# Allegro board POWER-PCB_2-2-2_160505.brd
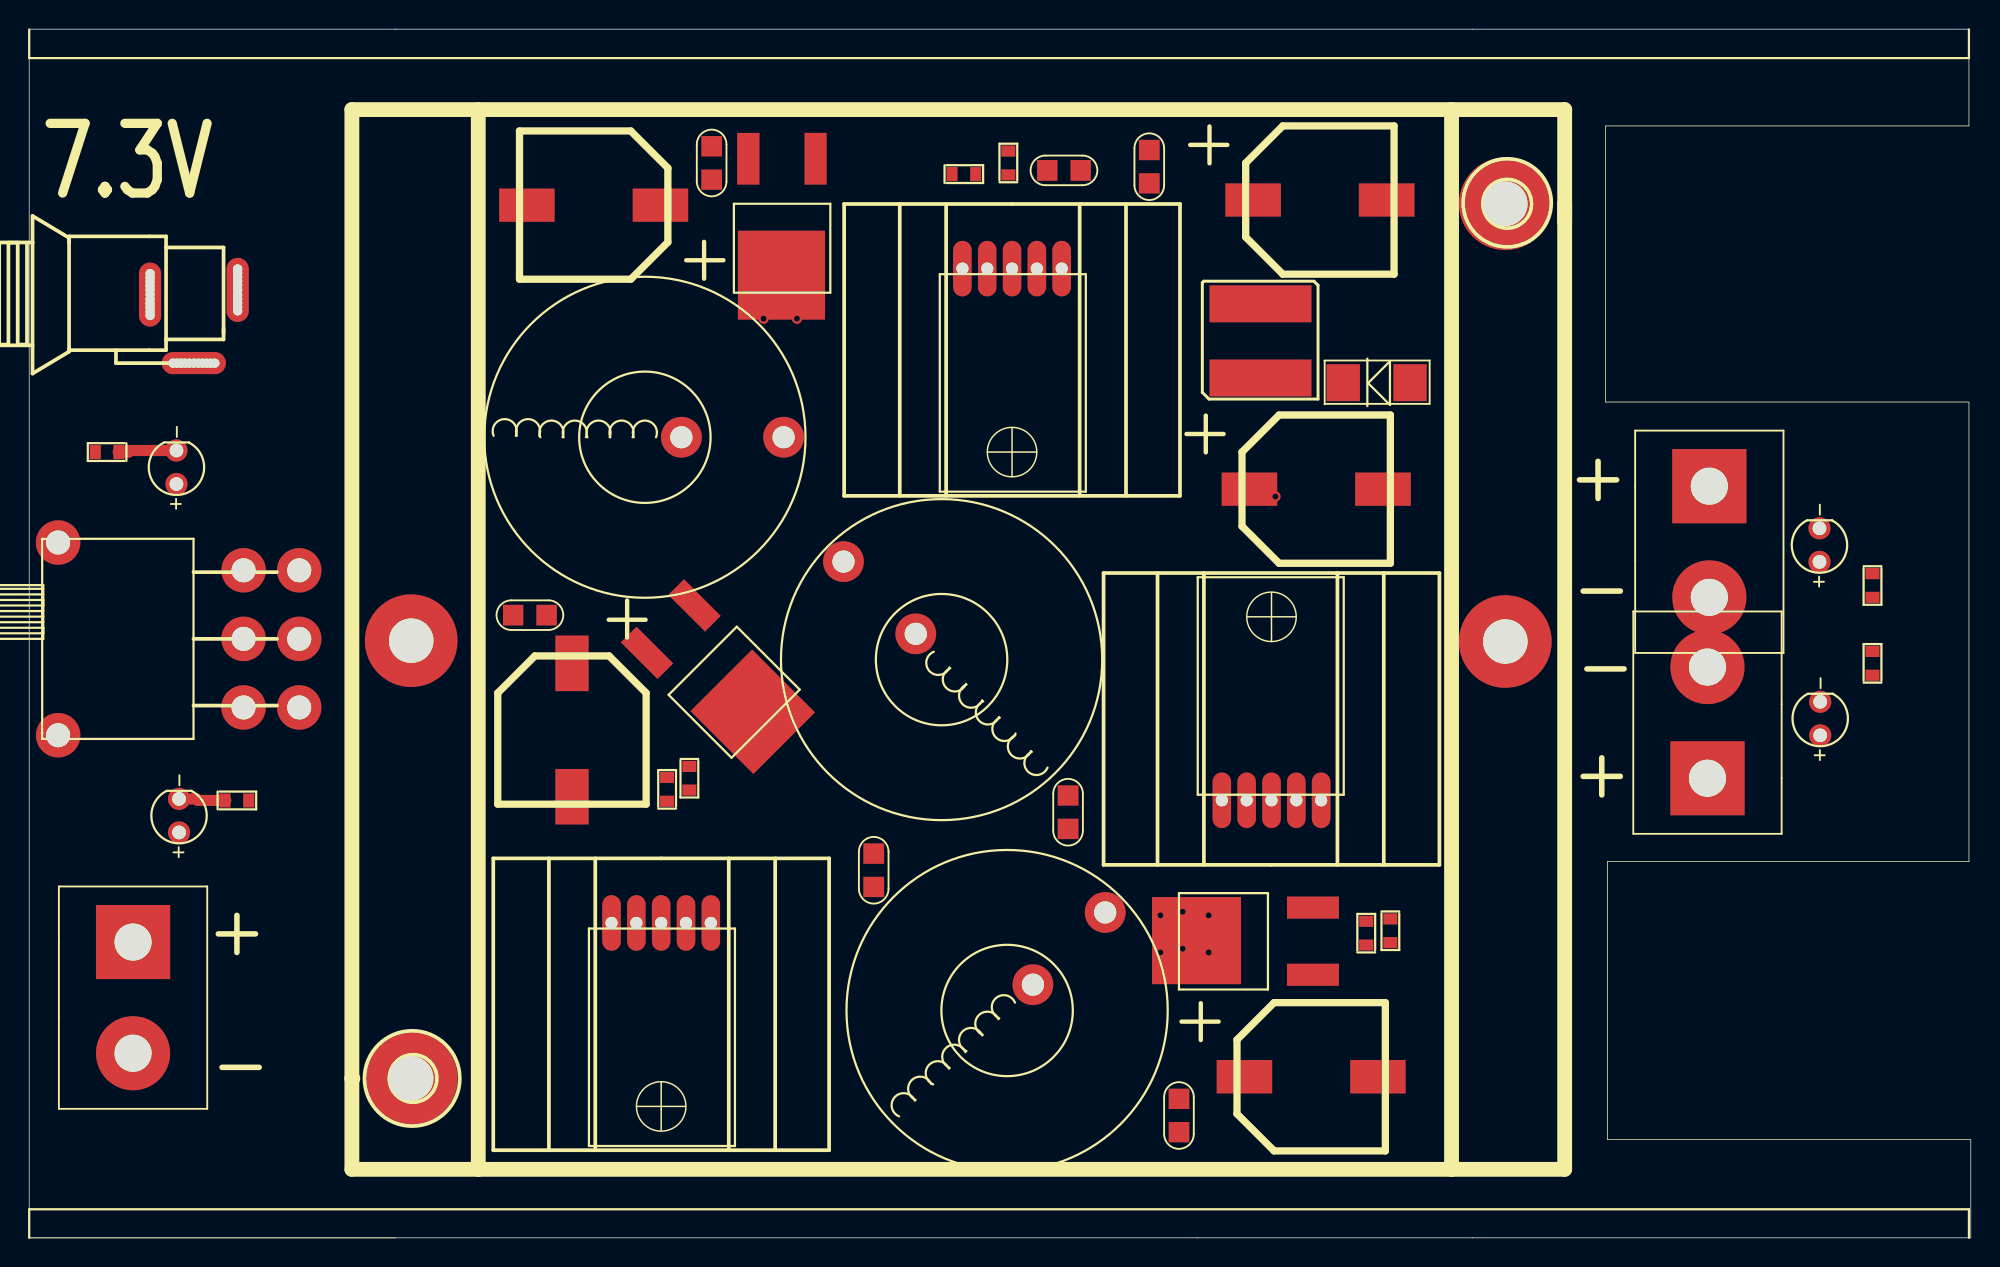
[diagram p0: board, top side]
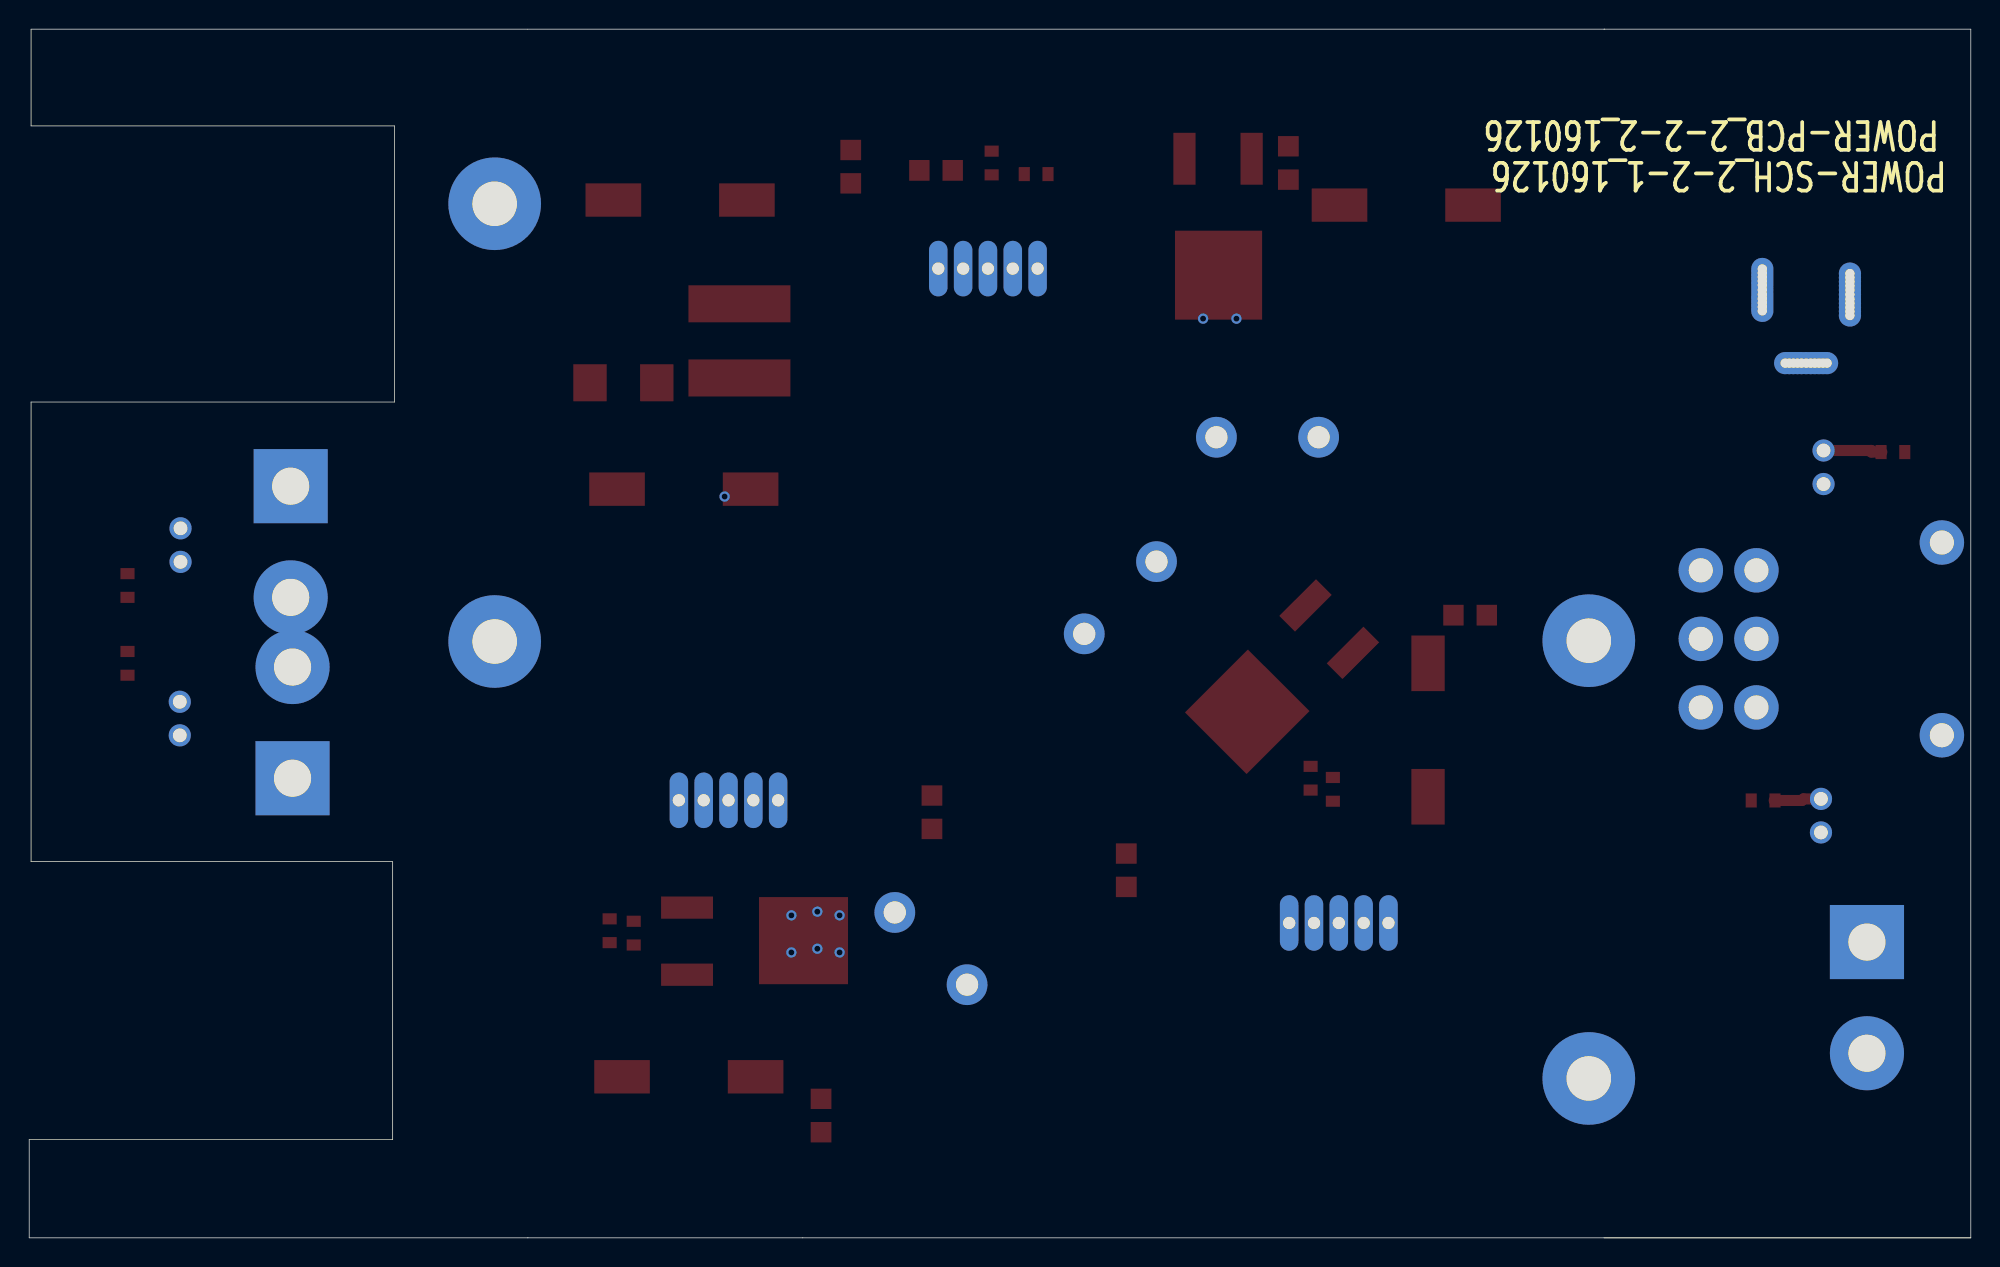
[diagram p1: board, bottom side, seen from below]

Outline 132.97 x 82.83 mm; copper layers: TOP, BOTTOM. Coordinates in mm from the lower left corner of the outline.
Outline path: 25.12,82.83 0,82.83 0,0 ; 0,0 80,0 ; 0,0 25.12,0 ; 25.06,82.83 132.84,82.83 132.84,76.2 107.95,76.2 107.95,57.28 132.84,57.28 132.84,25.78 108.08,25.78 108.08,6.73 132.97,6.73 132.97,0 98.81,0 ; 98.83,0 79.98,0

## Placement (name value [footprint] x y rotation side)
C101  1uF/50V  [C0805]  76.71 73.41 180 top
C102  1uF  [C0805]  70.87 73.15 270 top
C103  1uF/12V  [C0805]  46.74 73.66 180 top
C304  470uF/50V  [CAPAE830X1050L]  38.66 70.77 180 top
C305  220uF/50V  [CAPAE830X1050L]  88.39 71.12 0 top
C306  470uF/25V  [CAPAE830X1050L]  87.8 11.04 0 top
C307  1uF/12V  [C0805]  78.74 8.38 0 top
C309  470uF/25V  [CAPAE830X1050L]  37.17 34.8 270 top
C310  1uF/12V  [C0805]  34.29 42.67 270 top
C311  1uF  [C0805]  71.15 29.17 0 top
C312  1uF  [C0805]  57.84 25.19 180 top
C313  1uF/50V  [CAPAE830X1050L]  88.14 51.31 0 top
D301  ESD  [B130L]  92.28 58.6 0 top
D305  LED  [LED-3MM]  10.08 52.81 180 top
D306  LED  [LED-3MM]  122.66 35.59 180 top
D307  LED  [LED-3MM]  10.26 28.93 180 top
D308  LED  [LED-3MM]  122.61 47.47 180 top
D312  6CWQ04FN  [TO252AA]  53.85 72.64 180 top
D313  6CWQ04FN  [TO252AA]  86.61 18.03 90 top
D314  6CWQ04FN  [TO252AA]  46.48 42.42 225 top
H1  HEADER1_0  [HOLE250C120D]  101.09 70.87 0 top
H2  HEADER1_0  [HOLE250C120D]  101.09 40.87 0 top
H3  HEADER1_0  [HOLE250C120D]  26.16 40.92 0 top
H4  HEADER1_0  [HOLE250C120D]  26.16 10.92 0 top
L100  47UH/12A  [L_22X9MM_2]  42.16 54.86 0 top
L102  47UH/12A  [L_22X9MM_2]  66.97 15.58 45 top
L103  47UH/12A  [L_22X9MM_2]  62.48 39.62 135 top
L104  47UH/12A  [CD75]  84.33 61.47 0 top
R100  10K/[30K]  [R0603]  64.01 72.9 0 top
R101  2K/[6.19K]  [R0603]  67.06 73.66 90 top
R102  2.7K  [R0603]  93.22 21.04 270 top
R103  24K  [R0603]  91.57 20.88 90 top
R104  1.8K  [R0603]  43.69 30.73 90 top
R105  20K  [R0603]  45.21 31.5 270 top
R107  10K  [R0603]  5.33 53.85 180 top
R108  10K  [R0603]  126.24 39.37 90 top
R109  10K  [R0603]  14.22 29.97 0 top
R110  10K  [R0603]  126.24 44.7 270 top
U100  XL4016  [TO-220-5]  67.31 53.85 180 top
U301  -  [DC30L]  11.28 59.94 270 top
U303  SW  [TS-12P]  14.68 41.05 90 top
U304  XL4016  [TO-220-5]  85.08 42.56 0 top
U305  XL4016  [TO-220-5]  43.28 9 180 top
UNK12V  12V  [HEADER2-300MIL-200S100D]  114.94 31.5 0 top
UNK15V  15V  [HEADER2-300MIL-200S100D]  7.11 20.27 180 top
UNK36V  36V  [HEADER2-300MIL-200S100D]  115.06 51.51 180 top

## Library data of the parts
C101-C103 C307 C310-C313 = CAP
C304-C306 C309 = ECAP
D301 = DIODE
D305-D308 = LED
D312-D314 = 6CWQ04FN
H1-H4 = HEADER1_0
L100 L102-L104 = INDUCTOR_0
R100-R105 R107-R110 = RES
U100 U304 U305 = 6017_0
U301 = DC30L
U303 = SW
UNK12V UNK15V UNK36V = HEADER

## Footprints (pads in the part's own frame, mm; a bottom-side part is the same pattern mirrored in y, then rotated)
B130L
  rect 2.286x2.54 smd: 1(2.286,0) 2(-2.286,0)
C0805
  rect 1.422x1.397 smd: 1(0,1.143) 2(0,-1.143)
CAPAE830X1050L
  rect 3.81x2.286 smd: 1(-4.572,0) 2(4.572,0)
CD75
  rect 6.985x2.54 smd: 1(0,2.54) 2(0,-2.54)
DC30L
  round 1.524 hole 0.635: 1(-5.017,3) 2(0,0) 3(-4.7,-3) 4(-4.103,-3) 5(-3.824,-3) 6(-3.544,-3) 7(-3.265,-3) 8(-5.017,-3) 9(-5.297,-3) 10(-5.576,-3) 11(-5.856,-3) 12(-6.135,-3) 13(-4.382,-3) 14(-4.421,3) 15(-4.141,3) 16(-3.862,3) 17(-3.582,3) 18(-5.335,3) 19(-5.614,3) 20(-5.894,3) 21(-6.173,3) 22(-6.453,3) 23(-4.7,3) 24(0,0.597) 25(0,0.876) 26(0,1.156) 27(0,1.435) 28(0,-0.318) 29(0,-0.597) 30(0,-0.876) 31(0,-1.156) 32(0,-1.435) 33(0,0.318)
HEADER2-300MIL-200S100D
  rect 5.08x5.08 hole 2.54: 1(0,0)
  round 5.08 hole 2.54: 2(0,7.62)
HOLE250C120D
  round 6.35 hole 3.048: 1(0,0)
L_22X9MM_2
  round 2.794 hole 1.524: 1(2.5,0) 2(9.5,0)
LED-3MM
  round 1.524 hole 0.94: 1(0,1.15) 2(0,-1.15)
R0603
  rect 0.762x0.965 smd: 1(-0.813,0) 2(0.813,0)
TO252AA
  rect 1.524x3.556 smd: 1(-0.004,-1.304) 3(4.596,-1.304)
  rect 5.969x6.096 smd: 2(2.332,6.673)
TO-220-5
  oval 1.27x3.81 hole 0.838: 1(3.4,-12.573) 2(1.7,-12.573) 3(0,-12.573) 4(-1.7,-12.573) 5(-3.4,-12.573)
TS-12P
  round 3.048 hole 1.651: 1(-4.699,-3.81) 2(0,-3.81) 3(4.699,-3.81) 4(-4.699,0) 5(0,0) 6(4.699,0) 7(-6.604,12.7) 8(6.604,12.7)

## Nets
7V3: D305.1(ANODE) U301.1 U301.14 U301.15 U301.16 U301.17 U301.18 U301.19 U301.20 U301.21 U301.22 U301.23 U303.6
7V3OUT: C103.1 C304.1 L100.1 R100.1 U303.5
12V: C306.1 C307.1 D306.1(ANODE) L102.1 R103.1 UNK12V.1
15V: D307.1(ANODE) U303.1 UNK15V.1
15VOUT: C309.1 C310.1 L103.2 R105.1 U303.2
36V: C101.1 C102.1 C305.1 C311.1 C312.1 L104.1 U100.5(VIN) U304.5(VIN) U305.5(VIN)
GND: C101.2 C103.2 C304.2 C305.2 C306.2 C307.2 C309.2 C310.2 C313.2 D301.1 D312.1(A#1) D312.3(A#3) D313.1(A#1) D313.3(A#3) D314.1(A#1) D314.3(A#3) H1.1 H2.1 H3.1 H4.1 R101.2 R102.2 R104.2 R107.2 R108.2 R109.2 R110.2 U100.1(GND) U301.2 U301.3 U301.4 U301.5 U301.6 U301.7 U301.8 U301.9 U301.10 U301.11 U301.12 U301.13 U301.24 U301.25 U301.26 U301.27 U301.28 U301.29 U301.30 U301.31 U301.32 U301.33 U303.7 U303.8 U304.1(GND) U305.1(GND) UNK12V.2 UNK15V.2 UNK36V.2
IN: C313.1 D301.2 D308.1(ANODE) L104.2 UNK36V.1
N58857: D312.2(K) L100.2 U100.3(SW)
N58861: R100.2 R101.1 U100.2(FB)
N58971: D313.2(K) L102.2 U304.3(SW)
N58979: R102.1 R103.2 U304.2(FB)
N59235: D314.2(K) L103.1 U305.3(SW)
N59263: R104.1 R105.2 U305.2(FB)
N59549: C102.2 U100.4(VC)
N59581: C311.2 U304.4(VC)
N59703: C312.2 U305.4(VC)
N382581: D305.2(CATHODE) R107.1
N382921: D306.2(CATHODE) R108.1
N383261: D307.2(CATHODE) R109.1
N461730: D308.2(CATHODE) R110.1

Pads without a net: U303 3 4

## Via types
v1: diameter 0.711, hole 0.406, TOP to BOTTOM, 9 vias

## Routing (per net, layer and track width the routed paths; a pad name or vN(x,y) marks a point on that pad's centre or on a via; arc(x,y) is an arc through that point)
GND: length 2.9
  BOTTOM w0.305: U301.32 U301.31 U301.30 U301.29 U301.28 U301.2 U301.33 U301.24 U301.25 U301.26 U301.27
IN:
  vias: v1(85.34,50.8)
N58857:
  vias: v1(50.29,62.99) v1(52.58,62.99)
N58971:
  vias: v1(77.47,22.1) v1(77.47,19.56) v1(78.99,22.35) v1(78.99,19.81) v1(80.77,22.1) v1(80.77,19.56)
N382581: length 4.1
  TOP w0.762: 6.1,53.85 R107.1 6.81,53.85 6.81,53.96 D305.2
N383261: length 3.2
  TOP w0.762: 13.46,29.97 R109.1 11.56,29.97 11.46,30.08 D307.2

## Text on the board
BOTTOM: BOTTOM
Board Geometry/Soldermask Bottom: SOLDER_BOTTOM
Ref Des/Silkscreen Bottom: SILK_BOTTOM | POWER-SCH_2-2-1_160126 | POWER-PCB_2-2-2_160126
TOP: TOP
Board Geometry/Soldermask Top: SOLDER_TOP
Ref Des/Silkscreen Top: NOTE: | SILK_TOP | ETCH:TOP--BOTTOM | 7.3V
DIMENSION: DIMENSION | UNIT:MIL | DATA | TITLE: | LAYER: | VER:
DISPLAY_TOP: PAST_TOP
COMPVAL_TYPE_TOP: PAST_BOTTOM
DRILL: DRILL
User.8: FIGURE | SIZE | 16.0 | 25.0 | 33.0 | 37.0 | 60.0 | 65.0 | 100.0 | 120.0 | DRILL CHART: TOP to BOTTOM | ALL UNITS ARE IN MILS | PLATED | QTY | 835 | 33 | 15 | 8 | 6 | 3 | 4
